# Altium PCB PCB1.PcbDoc
Units mm, origin at the board's own origin, x right, y up, seen from the top; angles counter-clockwise.
Board outline 57.43 x 34.44 mm, 2 copper layers (Top Layer, Bottom Layer); 10 components, 7 nets, 26 pads, 0 vias.
Unrouted connection lines stored in the file: 17.
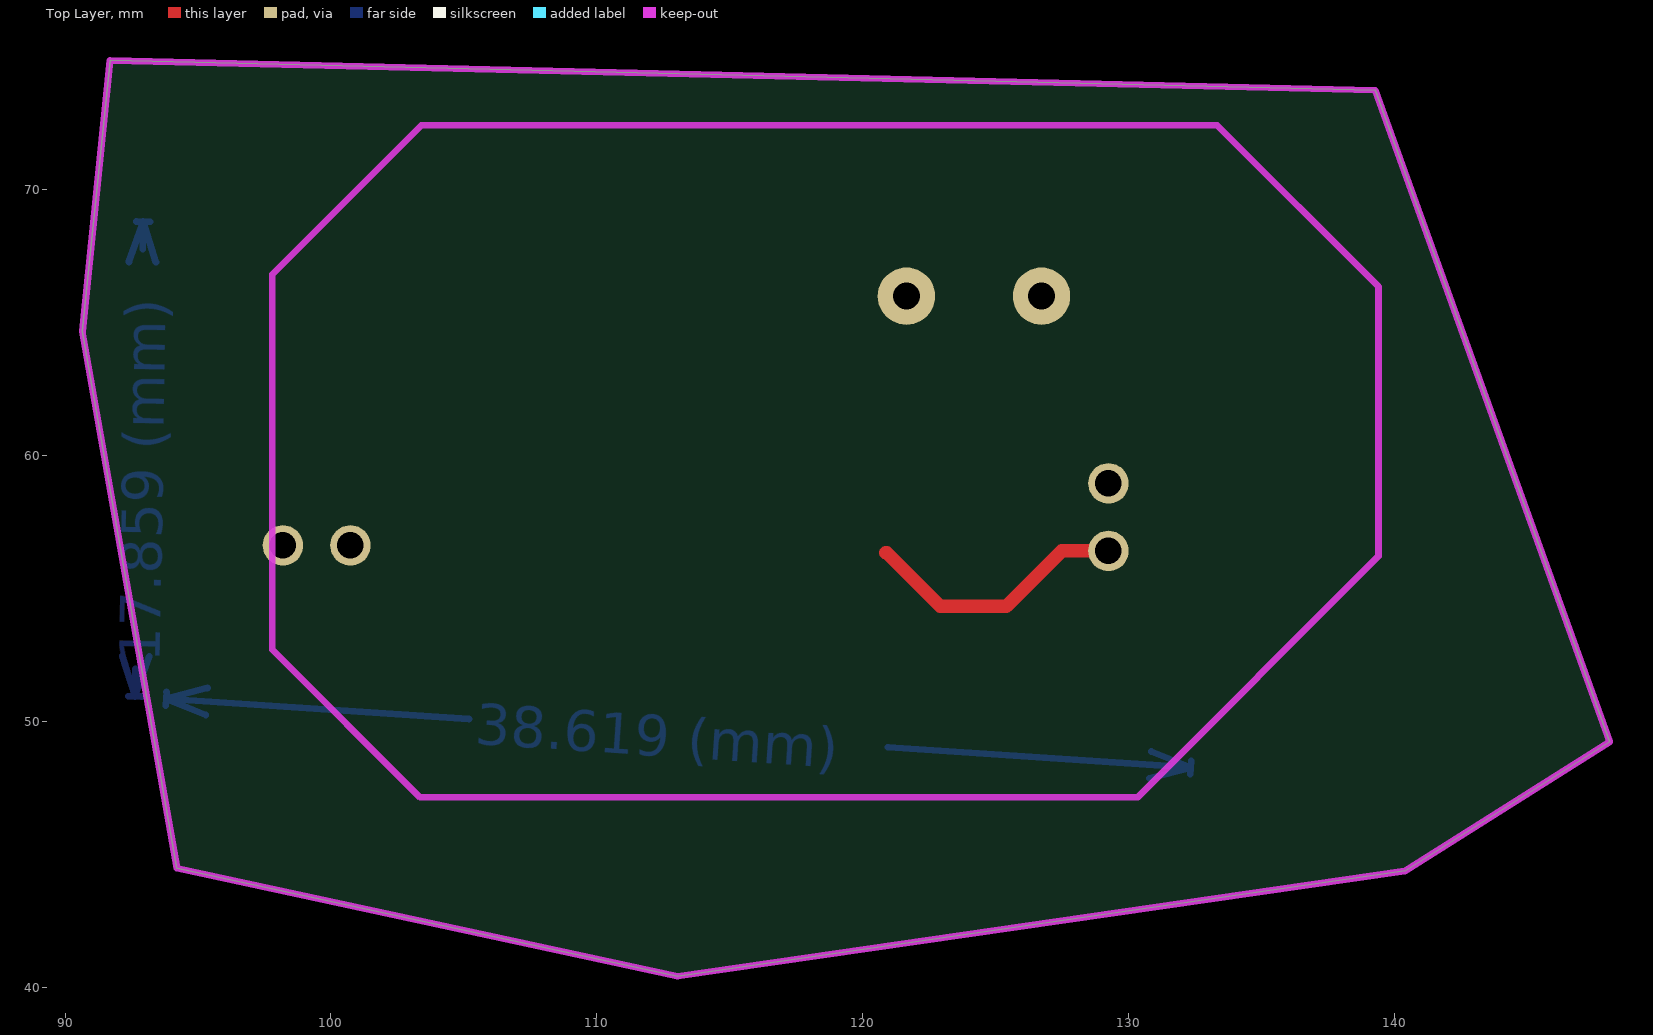
[diagram p0: Top Layer view]
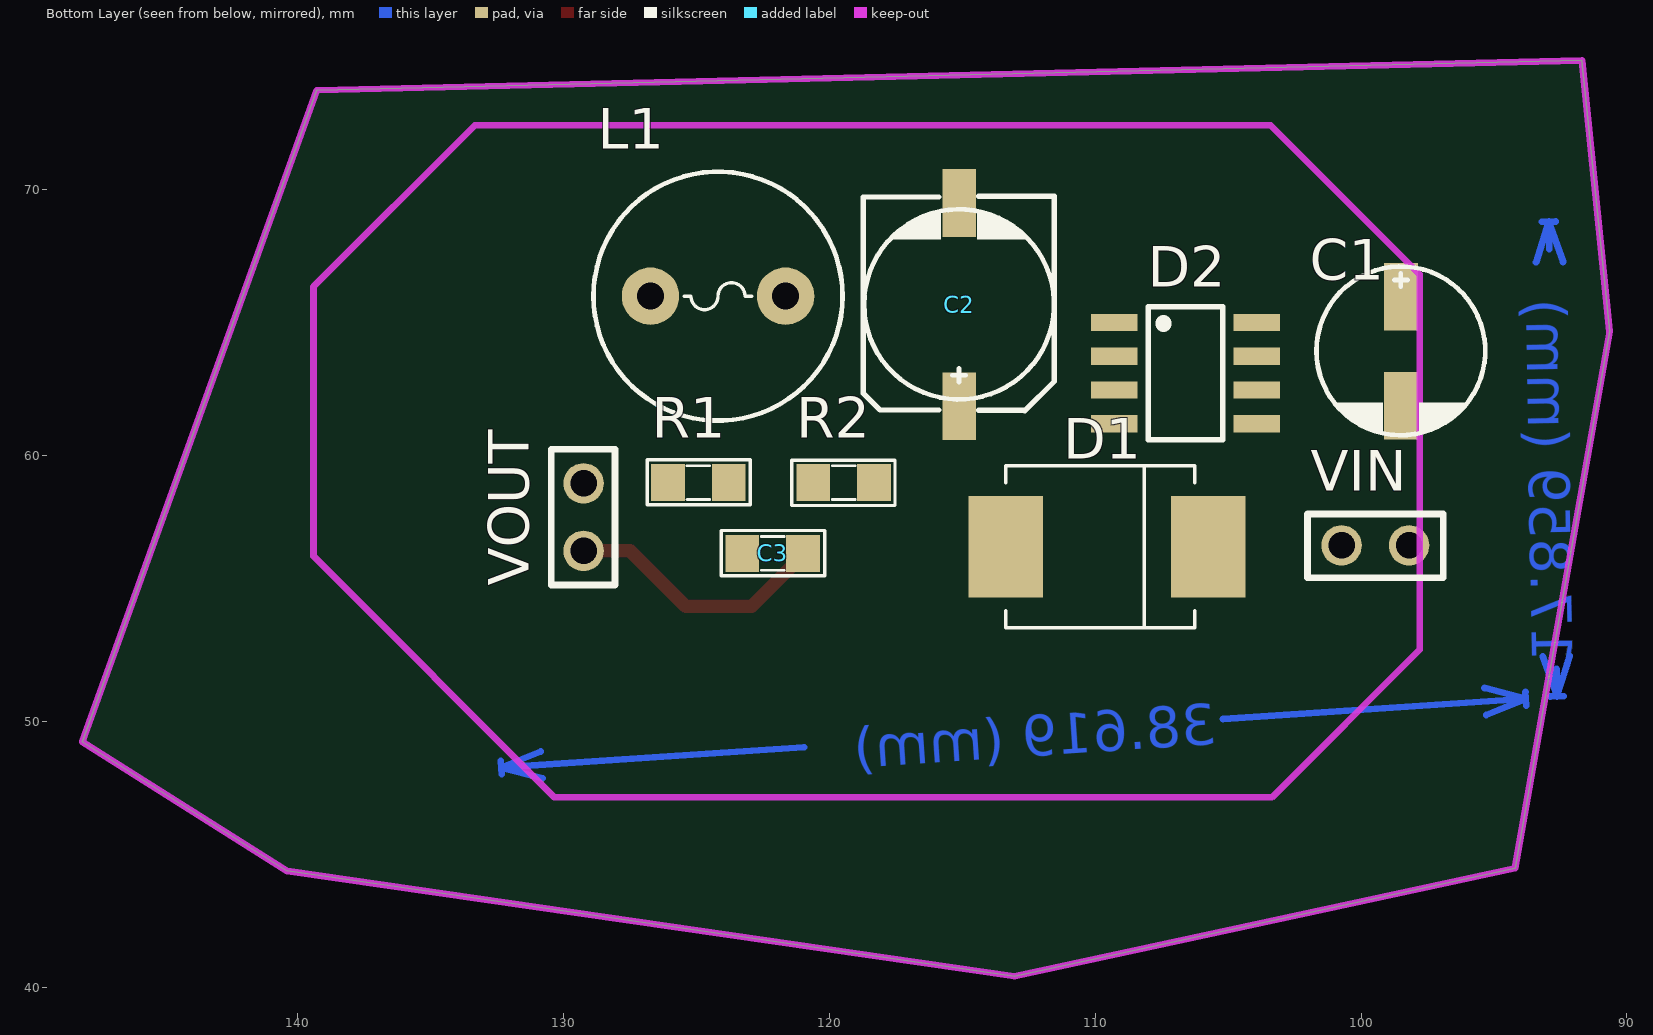
[diagram p1: Bottom Layer view, seen from below]

## Layer stack, top to bottom
Top Solder: solder mask 0.0102, Solder Resist, Dk 3.5
Top Layer: signal copper 0.0356
Dielectric1: dielectric 0.32, FR-4, Dk 4.8
Bottom Layer: signal copper 0.0356
Bottom Solder: solder mask 0.0102, Solder Resist, Dk 3.5

## Board outline
94.209,44.475 90.653,64.668 91.694,74.854 139.268,73.736 148.082,49.225 140.386,44.374 113.03,40.411

## Design rules (kind name [scope] priority, off if disabled: settings)
Clearance Clearance_2 [InNet('NetC3_2')] p1: gap=0.508
Clearance Clearance_1 [InNet('12V')] p2: gap=0.762
Clearance [All] p3: gap=0.254
DiffPairsRouting [All] p1: maxlimit=0.254 minlimit=0.254 mostfreqgap=0.254 toplayer_minwidth=0.381 toplayer_maxwidth=0.381 toplayer_prefwidth=0.381 bottomlayer_minwidth=0.381 bottomlayer_maxwidth=0.381 bottomlayer_prefwidth=0.381 maxuncoupledlength=12.7
PolygonConnect [All] p1: connectstyle=Relief reliefconductorwidth=0.254 reliefentries=4 polygonreliefangle="90 Angle" airgapwidth=0.254
RoomDefinition Sheet1 [InComponentClass('Sheet1')] p1: confinementstyle=ConfineIn formatcopy=TRUE lockcomponents=FALSE outline 0,0 50.8,0 50.8,25.4 0,25.4
RoutingVias [All] p1: holewidth=0.711 width=1.27 viastyle="Through Hole" minholewidth=0.711 minwidth=1.27 maxholewidth=0.711 maxwidth=1.27
SolderMaskExpansion [All] p1: expansion=0.102
UnpouredPolygon [All] p1: allowunpoured=FALSE
Width [All] p1: maxlimit=0.508 minlimit=0.508 preferedwidth=0.508
Width 12v [InNet('12V')] p2: maxlimit=1.524 minlimit=1.524 preferedwidth=1.524
Width 5v [InNet('NetC3_2')] p3: maxlimit=1.016 minlimit=1.016 preferedwidth=1.016
28 further rules are at their usual default settings.

## Classes and differential pairs
differential pair NET: +NET_P -NET_N

## Components (designator, comment, footprint, x,y, rotation, side; value= is the part's Value field where it differs from the comment)
C1 "10uF" CP1/2.5_SM 98.501,65.202 r270 bottom
C2 "0.01uF" CP1/470uF 115.011,61.671 r90 bottom
C3 "103" SM-0805 122.123,56.312 r0 bottom
D1 "3V3" SM-DIODE 109.55,56.566 r0 bottom
D2 "TPS5430" TPS5430 106.604,63.094 r180 bottom
L1 "150mH" L01 124.181,65.989 r180 bottom
R1 "1k" SM-0805 124.917,58.979 r0 bottom
R2 "1k" SM-0805 119.456,58.979 r180 bottom
VIN "JP2" CON2 99.492,56.617 r0 bottom
VOUT "JP2" CON2 129.235,57.709 r90 bottom

## Footprints (in the part's own frame and the unit in brackets; to place one, negate y for a bottom-side part, rotate by r counter-clockwise, add the part's x,y. Pads: shape width x height; smd on the part's side, far side on the other; paste and mask are expansions set on the pad)
CON2 [mm] "2-Pin Connector; pitch 2.54mm"
  round 1.524 hole 1: 1(-1.3,0) 2(1.24,0)
  silkscreen extent -2.58,-1.18 2.52,1.22
CP1/2.5_SM [mil] "Tu hoa SMD 33 >100 uF,50V, 220uF/16V,25V"
  rect 100x50 smd: 1(-30,0) 2(131,0)
  silkscreen extent -75,-125 175,125
CP1/470uF [mm] "Tu hoa SMD 33 >100 uF,50V, 220uF/16V,25V"
  rect 2.54x1.27 smd: 1(0.172,0.099) 2(7.82,0.099)
  silkscreen extent 0,-3.47 8.07,3.71
L01 [mil] "Inductor"
  round 85 hole 40: 1(-100,0) 2(100,0)
  silkscreen extent -184,-184 184,184
SM-0805 [mil] "Compoment SMD 80x50mil"
  rect 50x55 smd: 1(-45,0) 2(45,0)
  silkscreen extent -77,-34 76,33, body extent -40,-27 40,23, height 24
SM-DIODE [mil] "Magnetic-Core Inductor with Winding Polarity Marking; 2 Leads"
  rect 110x150 smd: 1(-150,0) 2(150,0)
  silkscreen extent -130,-120 150,120, body extent -103,-73 105,69, height 96
TPS5430 [mm] "SOIC, 8-Leads, Body 4.98x3.99mm, Pitch 1.27mm, IPC Medium Density"
  rect 1.75x0.65 smd: 1(-2.675,1.905) 2(-2.675,0.635) 3(-2.675,-0.635) 4(-2.675,-1.905) 5(2.675,-1.905) 6(2.675,-0.635) 7(2.675,0.635) 8(2.675,1.905)
  silkscreen extent -1.4,-2.5 1.4,2.5, body extent -2.96,-2.45 3.24,2.55, height 1.57

## Part data
C1 C2: library part CP9, "Cap 10000uF/63V"
C3: library part CM, "Cap SMD"
D1: library part DZ, "Diode Zenner"
L1: library part L1, "Inductor"
R1 R2: library part R, "Resistor 1/4W"
VIN VOUT: library part Con2, "Connector 2"

## Nets (pads, with @x,y where several pads share a name; then routed paths per layer and width w, separated by ;. In a path a pad name is that pad's centre, name@x,y a point inside that pad or via, vN(x,y) a via of type N, cw(c..) or ccw(c..) an arc to the next point about the centre after c; other vN are vias at no path point)
GND: C1.2 C3.1 D1.1 D2.6 R2.1 VIN.2 VOUT.1 | length 10.1
  Top Layer w0.508: 120.853,56.337 120.904,56.337 122.911,54.331 125.4,54.331 127.478,56.409 VOUT.1
NC: D2.5
NET1_P: C2.2 D1.2 D2.8 L1.2
NET_N: D2.4 R1.1 R2.2
NET_P: C3.2 L1.1 R1.2 VOUT.2
NetC1_1: C1.1 D2.7 VIN.1
NetC2_1: C2.1 D2.1
pads on no net: D2.2 D2.3
copper on no net: | length 39.8
  Bottom Layer w0.254: 92.149,52.469 92.631,50.937 ; 92.377,50.941 92.885,50.932 ; 92.402,67.278 92.935,68.793 ; 92.648,51.969 92.631,50.937 ; 92.681,68.797 93.189,68.788 ; 92.918,67.761 92.935,68.793 ; 93.165,52.452 92.631,50.937 ; 93.417,67.26 92.935,68.793 ; 93.785,50.597 93.819,51.104 ; 95.289,50.242 93.802,50.851 ; 95.357,51.255 93.802,50.851 ; 105.189,50.085 93.802,50.851 ; 120.947,49.026 132.334,48.26 ; 130.779,47.855 132.334,48.26 ; 130.848,48.869 132.334,48.26 ; 132.317,48.007 132.351,48.513

## Keep-outs
Keep-Out Layer:
  lines w0.254: 90.653,64.668 91.694,74.854 139.268,73.736 148.082,49.225 140.386,44.374 113.03,40.411 94.209,44.475 90.653,64.668 ; 97.79,52.705 97.79,66.802 103.403,72.415 133.325,72.415 139.395,66.345 139.395,56.21 130.327,47.142 103.353,47.142 97.79,52.705

## Other copper
Bottom Layer:
  text "17.859 (mm)" at 93.567,52.207 h1.52 r89.02
  text "38.619 (mm)" at 105.381,49.156 h1.52 r356.15

## Silkscreen, mask and mechanical layers (free items; w line width, h text height)
Top Solder:
  lines w0.254: 120.853,56.337 121.031,56.337 122.911,54.458 125.638,54.458 127.589,56.409 129.235,56.409